# EAGLE board SENSOR CAMERA 002 (EAGLE 5.10)
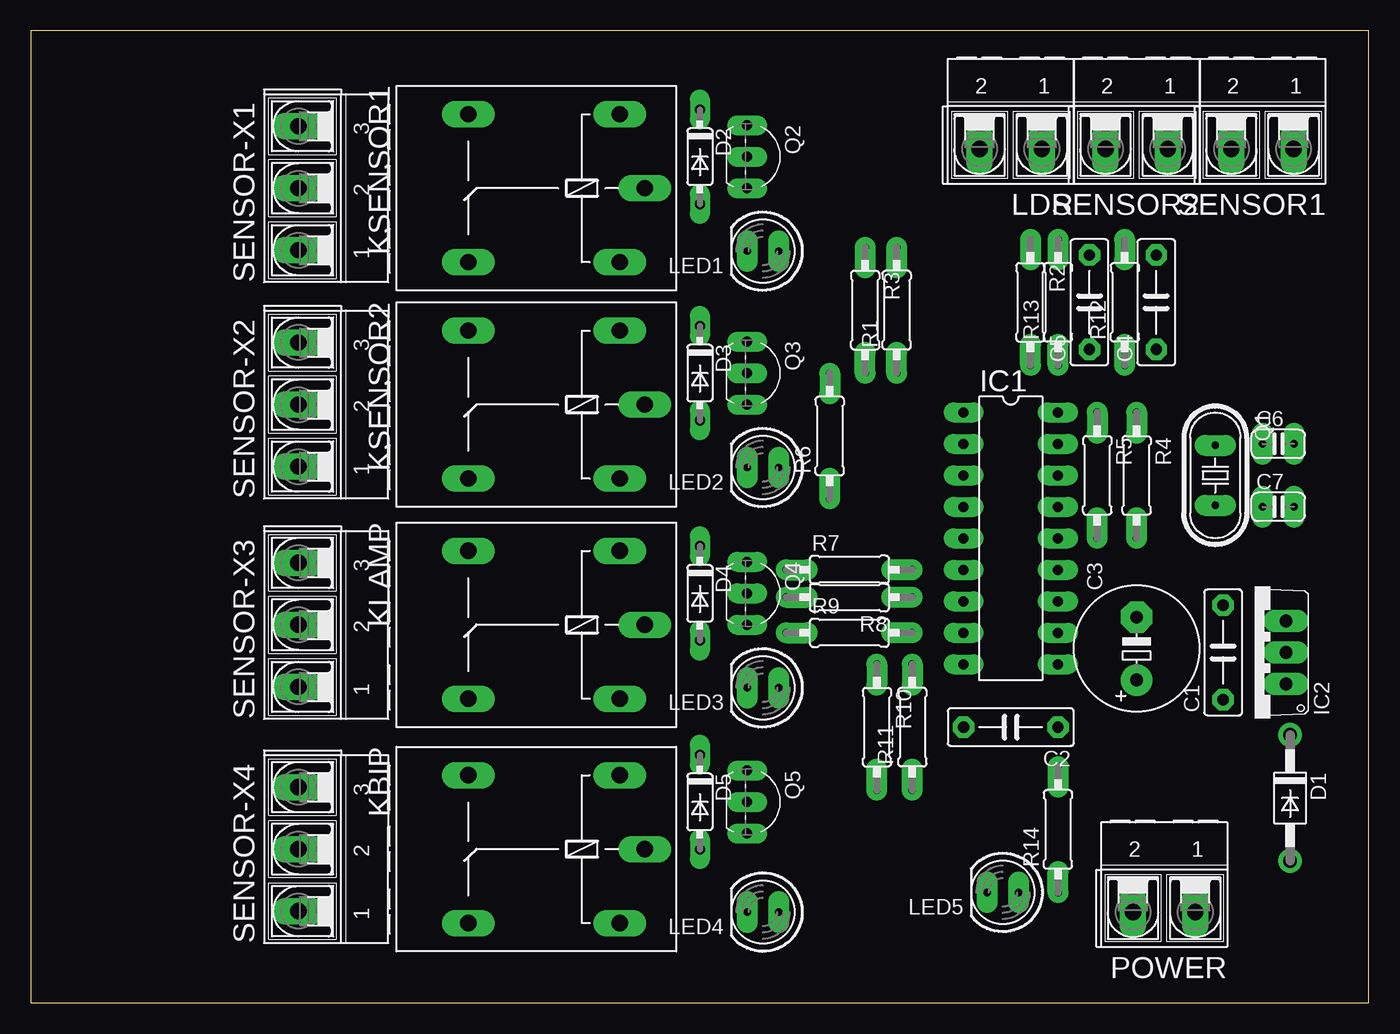
[diagram p0: board, top side]
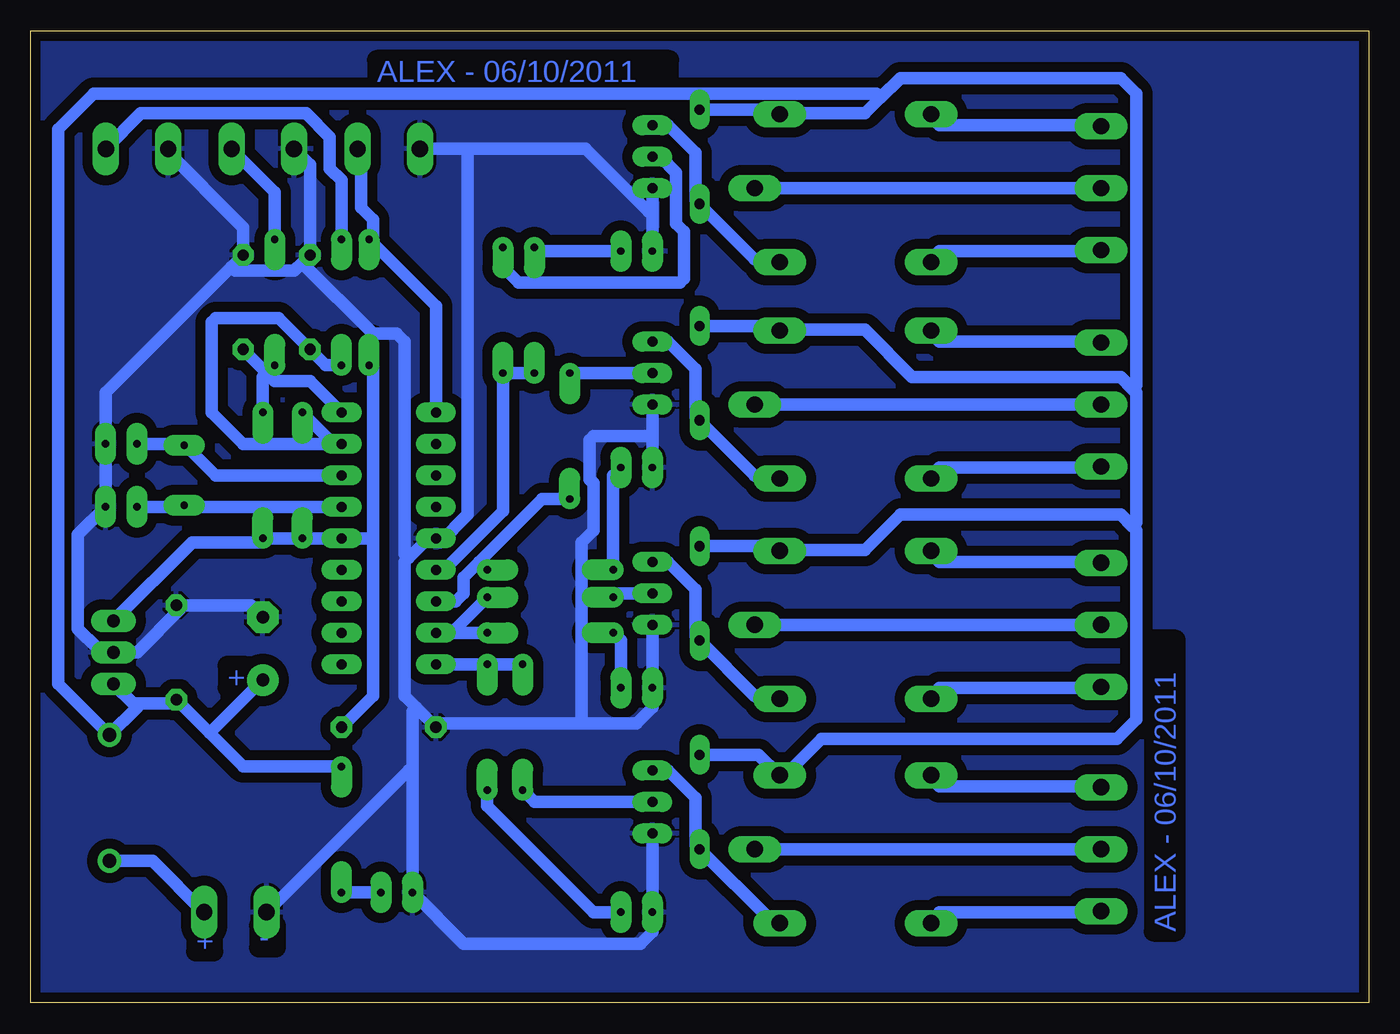
[diagram p1: board, bottom side, seen from below]

Size 107.93 x 78.41 mm. Coordinates in mm from the lower left corner, seen from the top.
Outline: 0,0 107.93,0 107.93,78.41 0,78.41 0,0
Copper layers (1*16): Top 0.035mm / dielectric 1.5mm / Bottom 0.035mm
Design rules "MUITO BOM FONTE": minimum track width 40mil, minimum drill 5mil, track to track 20mil, track to pad 20mil, pad to pad 20mil, via to via 20mil, smd to smd 20mil, copper to edge 20mil, drill to drill 20mil, minimum pad ring 16mil, minimum via ring 16mil, stop-mask expansion 4mil, vias tented up to drill 0mil, thermal gap 10mil

## Footprints (pad centres in the part's own frame; a part is rotated, then mirrored left to right if it is on the bottom)
C075-032X103 = drill 0.914 octagon: 1 -3.81,0; 2 3.81,0
E5-10,5 = drill 1.016 pad 2.54 round: + -2.54,0 | drill 1.016 pad 2.54 octagon: - 2.54,0
C025-024X044 = drill 0.6 pad 1.676 long: 1 -1.27,0; 2 1.27,0
DO41-10 = drill 1.118 round: A 5.08,0; C -5.08,0
DO35-7 = drill 0.813 long: A 3.81,0; C -3.81,0
DIL18 = drill 0.813 long: 1 -10.16,-3.81; 2 -7.62,-3.81; 3 -5.08,-3.81; 4 -2.54,-3.81; 5 0,-3.81; 6 2.54,-3.81; 7 5.08,-3.81; 8 7.62,-3.81; 9 10.16,-3.81; 10 10.16,3.81; 11 7.62,3.81; 12 5.08,3.81; 13 2.54,3.81; 14 0,3.81; 15 -2.54,3.81; 16 -5.08,3.81; 17 -7.62,3.81; 18 -10.16,3.81
TO220V = drill 1.016 long: 1 -2.54,-2.54; 2 0,-2.54; 3 2.54,-2.54
G5LE = drill 1.321 long: 1 -7.493,-5.969; 2 -7.493,5.969; O 4.699,5.969; P -9.525,0; S 4.699,-5.969
AK500/2-H = drill 1.321 long: 1 -2.515,0; 2 2.515,0
LED5MM = drill 0.6 pad 1.676 long: A -1.27,0; K 1.27,0
HC49U70 = drill 0.6 pad 1.676 long: 1 -2.413,0; 2 2.413,0
TO92-EBC = drill 0.813 long: B 0,-1.27; C -2.54,-1.27; E 2.54,-1.27
0207/10 = drill 0.6 pad 1.676 offset: 1 -5.08,0; 2 5.08,0
AK500/3-H = drill 1.321 long: 1 -5.004,0; 2 0,0; 3 5.004,0

## Placement (x,y rotation side)
C1  100NF  [C075-032X103]  96.2,28.26 90 top
C2  100NF  [C075-032X103]  79.06,22.23 180 top
C3  1000uF  [E5-10,5]  89.22,28.57 90 top
C4  100NF  [C075-032X103]  90.8,56.52 90 top
C5  100NF  [C075-032X103]  85.41,56.52 90 top
C6  33PF  [C025-024X044]  100.65,45.09 0 top
C7  33PF  [C025-024X044]  100.65,40.01 0 top
D1  1N4004  [DO41-10]  101.6,16.51 270 top
D2  1N4148  [DO35-7]  53.98,68.26 270 top
D3  1N4148  [DO35-7]  53.98,50.8 270 top
D4  1N4148  [DO35-7]  53.98,33.02 270 top
D5  1N4148  [DO35-7]  53.98,16.19 270 top
IC1  PIC16F628P  [DIL18]  79.06,37.47 270 top
IC2  7805  [TO220V]  98.74,28.26 90 top
KBIP  RBIP  [G5LE]  40,12.38 180 top
KLAMP  RLAMP  [G5LE]  40,30.48 180 top
KSENSOR1  RSENSOR1  [G5LE]  40,65.72 180 top
KSENSOR2  RSENSOR2  [G5LE]  40,48.26 180 top
LDR  ldr  [AK500/2-H]  79.06,68.9 180 top
LED1  SENSOR 1  [LED5MM]  59.05,60.64 180 top
LED2  SENSOR 2  [LED5MM]  59.05,43.18 180 top
LED3  LAMPADA  [LED5MM]  59.05,25.4 180 top
LED4  BIP  [LED5MM]  59.05,7.3 180 top
LED5  POWER  [LED5MM]  78.42,8.89 180 top
POWER  power  [AK500/2-H]  91.44,7.3 180 top
Q1  4MHZ  [HC49U70]  95.57,42.55 270 top
Q2  BC548A  [TO92-EBC]  59.05,68.26 270 top
Q3  BC548A  [TO92-EBC]  59.05,50.8 270 top
Q4  BC548A  [TO92-EBC]  59.05,33.02 270 top
Q5  BC548A  [TO92-EBC]  59.05,16.19 270 top
R1  10K  [0207/10]  69.85,55.88 90 top
R2  10K  [0207/10]  80.64,56.52 270 top
R3  270R  [0207/10]  67.31,55.88 270 top
R4  10K  [0207/10]  89.22,42.55 270 top
R5  10K  [0207/10]  86.04,42.55 270 top
R6  10K  [0207/10]  64.45,45.72 90 top
R7  270R  [0207/10]  66.04,34.92 0 top
R8  10K  [0207/10]  66.04,32.7 180 top
R9  270R  [0207/10]  66.04,29.84 0 top
R10  10K  [0207/10]  68.26,22.23 270 top
R11  270R  [0207/10]  71.12,22.23 90 top
R12  220R  [0207/10]  88.27,56.52 90 top
R13  220R  [0207/10]  82.87,56.52 90 top
R14  680R  [0207/10]  82.87,13.97 90 top
SENSOR1  sensor1  [AK500/2-H]  99.38,68.9 180 top
SENSOR2  sensor2  [AK500/2-H]  89.22,68.9 180 top
SENSOR-X1  [AK500/3-H]  21.59,65.72 90 top
SENSOR-X2  [AK500/3-H]  21.59,48.26 90 top
SENSOR-X3  LAMP  [AK500/3-H]  21.59,30.48 90 top
SENSOR-X4  BIP  [AK500/3-H]  21.59,12.38 90 top

## Library data of the parts
C1-C7 R1-R14 = rcl
D1-D5 = diode
IC1 = microchip
IC2 = linear
KBIP KLAMP KSENSOR1 KSENSOR2 = relay
LDR POWER SENSOR1 SENSOR2 SENSOR-X1-SENSOR-X4 = con-ptr500
LED1-LED5 = led
Q1 = crystal
Q2-Q5 = transistor-npn

## Nets
+12V: C1.1 C3.+ D1.C D2.C D3.C D4.C D5.C IC2.1 KBIP.1 KLAMP.1 KSENSOR1.1 KSENSOR2.1 R14.2
GND: C1.2 C2.2 C3.- C4.2 C5.2 C6.2 C7.2 IC1.5 IC2.2 LDR.2 LED1.K LED2.K LED3.K LED4.K LED5.K POWER.2 Q2.E Q3.E Q4.E Q5.E SENSOR1.2 SENSOR2.2
N$1: D1.A POWER.1
N$2: R13.2 SENSOR1.1
N$3: IC1.6 R1.1 R3.2
N$4: C2.1 IC1.14 IC2.3 R2.2 R4.2 R5.2
N$5: KSENSOR1.P SENSOR-X1.2
N$6: KSENSOR1.O SENSOR-X1.1
N$7: KSENSOR1.S SENSOR-X1.3
N$8: D2.A KSENSOR1.2 Q2.C
N$9: LED1.A R3.1
N$10: Q2.B R1.2
N$11: C5.1 IC1.17 R5.1 R13.1
N$12: C6.1 IC1.16 Q1.1
N$13: IC1.1 LDR.1 R2.1
N$14: C4.1 IC1.18 R4.1 R12.1
N$15: C7.1 IC1.15 Q1.2
N$16: KSENSOR2.P SENSOR-X2.2
N$17: KSENSOR2.O SENSOR-X2.1
N$18: KSENSOR2.S SENSOR-X2.3
N$19: D3.A KSENSOR2.2 Q3.C
N$20: Q3.B R6.2
N$21: R12.2 SENSOR2.1
N$22: LED2.A R7.1
N$23: KLAMP.P SENSOR-X3.2
N$24: KLAMP.O SENSOR-X3.1
N$25: KLAMP.S SENSOR-X3.3
N$26: D4.A KLAMP.2 Q4.C
N$27: Q4.B R8.2
N$28: IC1.8 R8.1 R9.2
N$29: LED3.A R9.1
N$30: KBIP.P SENSOR-X4.2
N$31: KBIP.O SENSOR-X4.1
N$32: KBIP.S SENSOR-X4.3
N$33: D5.A KBIP.2 Q5.C
N$34: Q5.B R10.2
N$36: LED4.A R11.1
N$37: IC1.9 R10.1 R11.2
N$38: IC1.7 R6.1 R7.2
N$40: LED5.A R14.1

## Tracks (layer width: path | path; a pad name or v marks a point on that pad's centre or on a via)
+12V
  Bottom 1.016: R14.2 90.8,19.05 93.5,21.75 | 93.5,21.75 C1.1 96.52,24.13 99.69,24.13 | 99.69,24.13 IC2.1 | 99.69,24.13 99.38,23.81 D1.C 105.73,25.72 105.73,70.48 102.87,73.34 39.69,73.34 39.37,73.03 | C3.+ 93.34,21.91 93.5,21.75 | D2.C 47.94,72.07 47.62,71.75 KSENSOR1.1 46.99,71.75 40.64,71.75 39.37,73.03 | D3.C 47.94,54.61 47.62,54.29 KSENSOR2.1 46.99,54.29 40.64,54.29 36.83,50.48 20,50.48 19.05,49.53 | D4.C 47.94,36.83 47.62,36.51 KLAMP.1 46.99,36.51 40.64,36.51 37.78,39.37 20,39.37 19.05,38.42 | D5.C 49.21,20 47.62,18.41 KBIP.1 46.99,18.41 44.13,21.27 20.32,21.27 18.73,22.86 18.73,38.1 19.05,38.42 | 19.05,49.53 18.73,49.21 18.73,38.73 19.05,38.42 | 39.37,73.03 37.78,74.61 20,74.61 18.73,73.34 18.73,49.85 19.05,49.53
GND
  Bottom 1.016: C3.- 90.17,32.07 C1.2 95.89,31.75 99.38,28.26 IC2.2 101.6,28.57 102.55,28.57 104.14,30.16 104.14,37.78 C7.2 C6.2 101.92,49.21 91.76,59.37 | SENSOR2.2 86.68,68.9 85.41,67.63 C5.2 86.04,59.69 | SENSOR1.2 97.16,68.9 90.8,62.55 C4.2 91.76,59.37 | 86.04,59.69 86.68,59.05 91.44,59.05 91.76,59.37 | 57.78,63.82 LED1.K | 57.78,63.82 Q2.E | 72.71,68.9 63.18,68.9 58.1,63.82 57.78,63.82 | 72.71,68.9 LDR.2 | Q5.E LED4.K 57.78,5.71 58.74,4.76 73.03,4.76 LED5.K 77.15,18.73 | 57.78,45.72 LED2.K | 57.78,45.72 Q3.E | Q4.E LED3.K 57.78,23.81 59.05,22.54 63.5,22.54 | 77.47,35.88 77.79,35.56 77.79,24.77 76.84,23.81 | 77.47,35.88 75.88,37.47 IC1.5 74.93,37.15 72.71,39.37 72.71,68.9 | 76.84,23.81 C2.2 74.93,22.54 63.5,22.54 | 77.15,18.73 77.15,23.5 76.84,23.81 | POWER.2 88.9,7.3 77.47,18.73 77.15,18.73 | 57.78,45.72 62.55,45.72 62.86,45.4 62.86,42.23 62.55,41.91 62.55,38.1 63.5,37.15 63.5,22.54 | 86.04,59.69 80.33,53.98 78.42,53.98 77.79,53.34 77.79,36.2 77.47,35.88
  pour Bottom (isolate 0.813): 0,78.42 107.95,78.42 107.95,0 0,0
N$1
  Bottom 1.016: D1.A 98.11,11.43 93.98,7.3 POWER.1
N$2
  Bottom 1.016: R13.2 82.87,66.36 83.82,67.31 83.82,69.85 85.72,71.75 99.06,71.75 101.92,68.9 SENSOR1.1
N$3
  Bottom 1.016: IC1.6 74.61,34.92 69.85,39.69 R1.1 R3.2
N$4
  Bottom 1.016: IC2.3 94.93,37.15 89.53,37.15 R4.2 R5.2 IC1.14 80.33,37.47 | R2.2 80.33,51.12 80.33,37.47 | 80.33,37.47 80.33,24.77 C2.1
N$5
  Bottom 1.016: SENSOR-X1.2 KSENSOR1.P
N$6
  Bottom 1.016: SENSOR-X1.1 21.59,60.64 34.61,60.64 35.24,60.01 KSENSOR1.O
N$7
  Bottom 1.016: SENSOR-X1.3 21.59,70.8 34.61,70.8 35.24,71.44 KSENSOR1.S
N$8
  Bottom 1.016: KSENSOR1.2 47.62,60.01 49.53,60.01 D2.A 54.29,64.77 54.29,68.58 56.52,70.8 Q2.C
N$9
  Bottom 1.016: LED1.A 66.99,60.64 R3.1
N$10
  Bottom 1.016: Q2.B 57.15,68.26 55.88,66.99 55.88,62.87 55.24,62.23 55.24,58.42 55.56,58.1 68.58,58.1 69.85,59.37 R1.2
N$11
  Bottom 1.016: R13.1 84.14,51.44 C5.1 87.95,55.24 93.03,55.24 93.34,54.93 93.34,47.62 90.8,45.09 84.14,45.09 83.82,45.4 | IC1.17 83.5,45.09 83.82,45.4 | 83.82,45.4 R5.1
N$12
  Bottom 1.016: IC1.16 93.03,42.55 95.57,45.09 Q1.1 95.89,45.09 C6.1
N$13
  Bottom 1.016: IC1.1 75.25,56.2 R2.1 80.33,61.91 80.33,63.18 81.28,64.14 81.28,68.9 LDR.1
N$14
  Bottom 1.016: IC1.18 85.41,50.16 88.27,50.16 88.9,50.8 | 88.9,50.8 C4.1 | R4.1 89.22,50.48 88.9,50.8 | 88.9,50.8 R12.1
N$15
  Bottom 1.016: IC1.15 95.57,40.01 Q1.2 95.89,40.01 C7.1
N$16
  Bottom 1.016: SENSOR-X2.2 KSENSOR2.P
N$17
  Bottom 1.016: SENSOR-X2.1 21.59,43.18 34.61,43.18 35.24,42.55 KSENSOR2.O
N$18
  Bottom 1.016: SENSOR-X2.3 21.59,53.34 34.61,53.34 35.24,53.98 KSENSOR2.S
N$19
  Bottom 1.016: KSENSOR2.2 47.62,42.55 49.53,42.55 D3.A 54.29,47.31 54.29,51.12 56.52,53.34 Q3.C
N$20
  Bottom 1.016: Q3.B R6.2
N$21
  Bottom 1.016: R12.2 88.27,65.41 91.76,68.9 SENSOR2.1
N$22
  Bottom 1.016: R7.1 60.96,42.55 LED2.A
N$23
  Bottom 1.016: SENSOR-X3.2 KLAMP.P
N$24
  Bottom 1.016: SENSOR-X3.1 21.59,25.4 34.61,25.4 35.24,24.77 KLAMP.O
N$25
  Bottom 1.016: SENSOR-X3.3 21.59,35.56 34.61,35.56 35.24,36.2 KLAMP.S
N$26
  Bottom 1.016: KLAMP.2 47.62,24.77 49.53,24.77 D4.A 54.29,29.53 54.29,33.34 56.52,35.56 Q4.C
N$27
  Bottom 1.016: Q4.B 60.64,33.02 R8.2
N$28
  Bottom 1.016: R9.2 73.66,29.84 | 73.66,29.84 IC1.8 | R8.1 73.66,30.16 73.66,29.84
N$29
  Bottom 1.016: LED3.A 60.32,29.21 R9.1
N$30
  Bottom 1.016: SENSOR-X4.2 KBIP.P
N$31
  Bottom 1.016: SENSOR-X4.1 21.59,7.3 34.61,7.3 35.24,6.67 KBIP.O
N$32
  Bottom 1.016: SENSOR-X4.3 21.59,17.46 34.61,17.46 35.24,18.1 KBIP.S
N$33
  Bottom 1.016: KBIP.2 47.62,6.67 48.26,6.67 D5.A 54.29,12.7 54.29,16.51 56.52,18.73 Q5.C
N$34
  Bottom 1.016: Q5.B 67.31,16.19 R10.2
N$36
  Bottom 1.016: LED4.A 62.55,7.3 71.12,15.88 R11.1
N$37
  Bottom 1.016: IC1.9 R11.2 R10.1
N$38
  Bottom 1.016: IC1.7 73.66,32.38 73.03,33.02 73.03,34.29 71.75,35.56 | 71.75,35.56 66.67,40.64 R6.1 | R7.2 71.75,35.56
N$40
  Bottom 1.016: LED5.A R14.1

## Text on the board
Bottom: ALEX - 06/10/2011 | + | ALEX - 06/10/2011 | - | +